# Altium PCB Punch Activated Solenoid Gun V2.PcbDoc
Units mm, origin at the board's own origin, x right, y up, seen from the top; angles counter-clockwise.
Board outline 67.59 x 51.5 mm, 2 copper layers (Top Layer, Bottom Layer); 7 components, 9 nets, 55 pads, 0 vias.
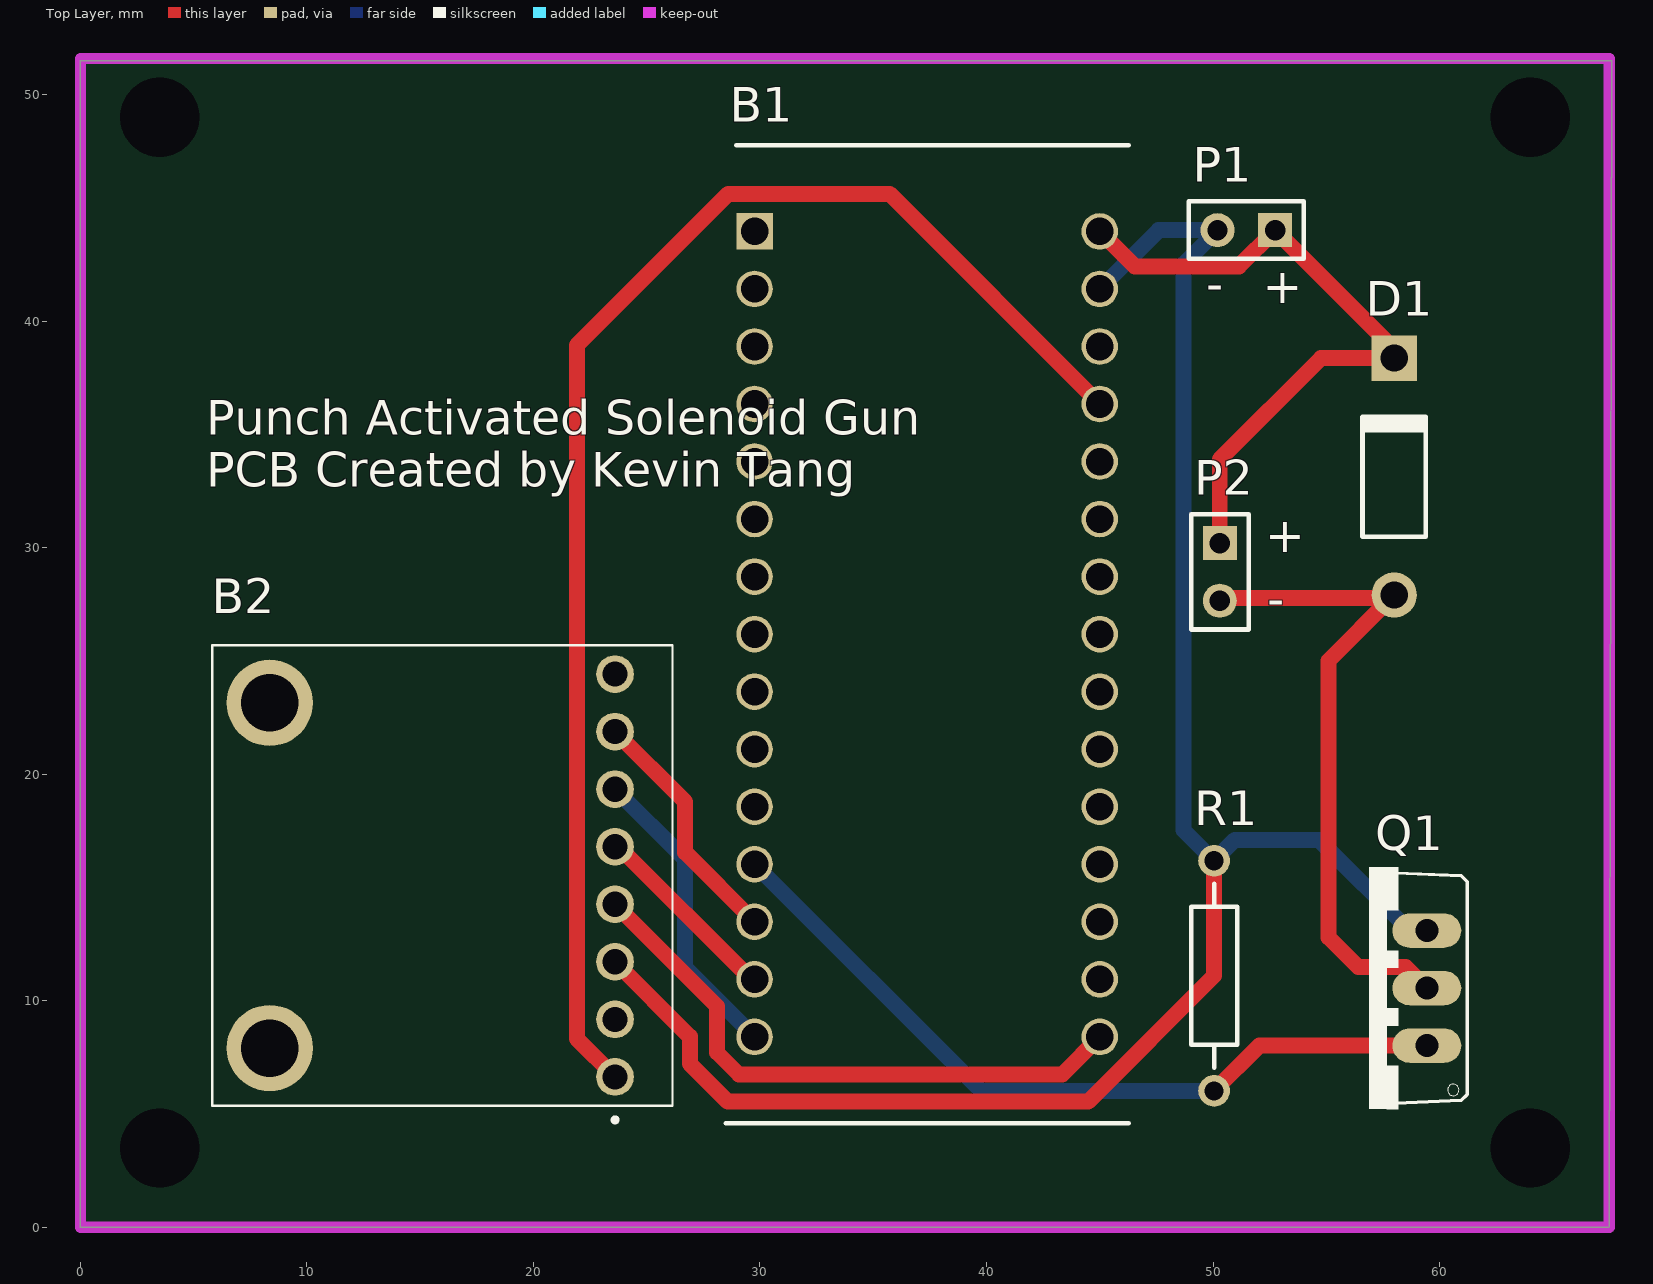
[diagram p0: Top Layer view]
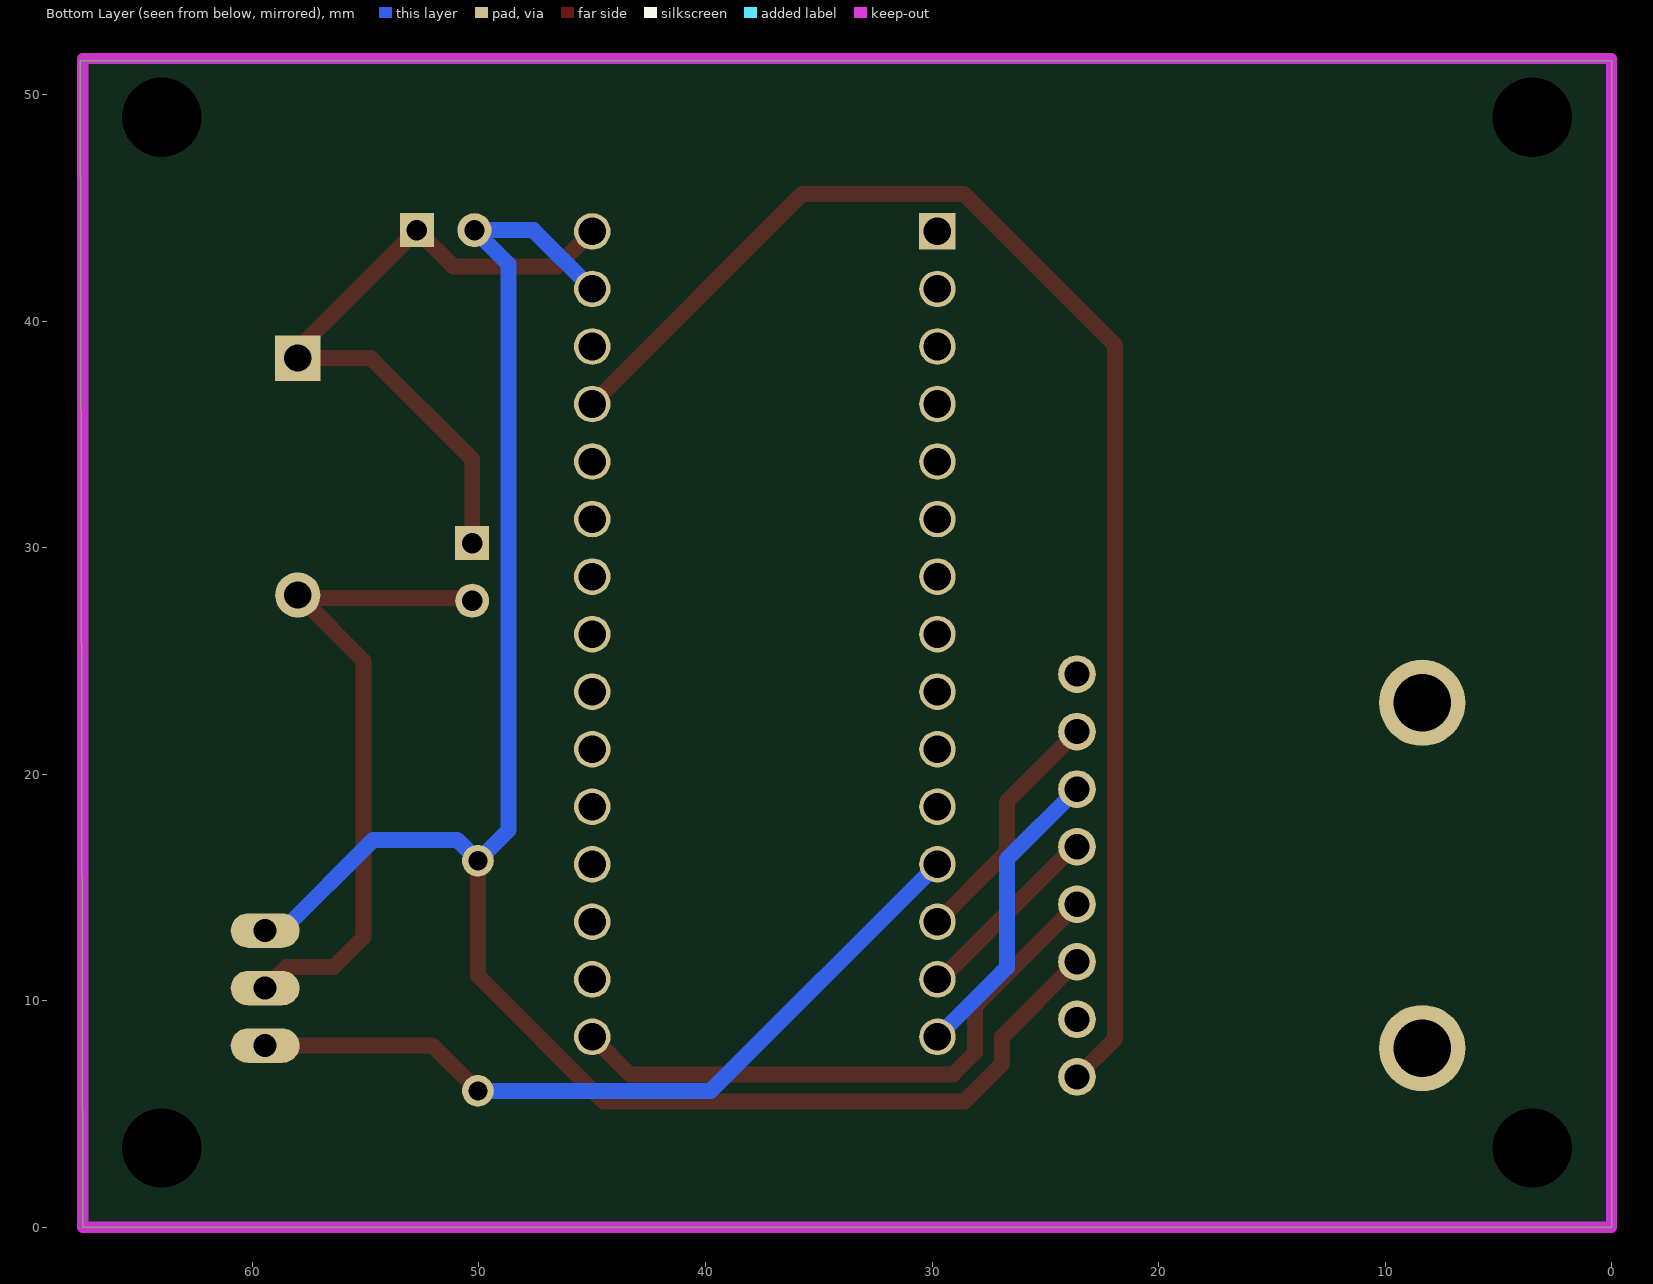
[diagram p1: Bottom Layer view, seen from below]

## Layer stack, top to bottom
Top Solder: solder mask 0.0102, Solder Resist, Dk 3.5
Top Layer: signal copper 0.0356
Dielectric 1: dielectric 0.32, FR-4, Dk 4.8
Bottom Layer: signal copper 0.0356
Bottom Solder: solder mask 0.0102, Solder Resist, Dk 3.5

## Board outline
0,0 67.5,0 67.594,51.5 0,51.5

## Design rules (kind name [scope] priority, off if disabled: settings)
Clearance [All] p1: gap=0.5 ignorepadtopadclearanceinfootprint=FALSE
HoleSize [All] p1: absolutevalues=TRUE maxlimit=10 minlimit=0.3 maxpercent=80.000 minpercent=20.000
PolygonConnect [All] p1: connectstyle=Relief reliefconductorwidth=0.5 reliefentries=4 polygonreliefangle="90 Angle" airgapwidth=0.5
RoutingVias [All] p1: holewidth=0.7 width=1.7 viastyle="Through Hole" minholewidth=0.6 minwidth=1.2 maxholewidth=1 maxwidth=2.2
SilkToSilkClearance [All] p1: silktosilkclearance=0.1
SilkToSolderMaskClearance [IsPad] p1: minsilkscreentomaskgap=0.1 clearancetoexposedcopper=TRUE
SolderMaskExpansion [All] p1: expansion=0.102
Width [All] p1: maxlimit=10 minlimit=0.5 preferedwidth=0.7
27 further rules are at their usual default settings.

## Components (designator, comment, footprint, x,y, rotation, side; value= is the part's Value field where it differs from the comment)
B1 "Nano" DIP1524W102P254L4318H762Q30N 37.38,26.185 r0 top
B2 "2809" 2809 23.6,6.64 r90 top
D1 "Diode 1N4007" DO-41 58,33.14 r90 top
P1 "LiPo Input" HDR1X2 52.74,44.023 r180 top
P2 "Solenoid Valve" HDR1X2 50.3,30.2 r270 top
Q1 "IRF520" TO220BV_IRF520(Primary) 56.898,10.559 r90 top
R1 "Res2" AXIAL-0.4 50.046,11.1 r270 top value=10K

## Footprints (in the part's own frame and the unit in brackets; to place one, negate y for a bottom-side part, rotate by r counter-clockwise, add the part's x,y. Pads: shape width x height; smd on the part's side, far side on the other; paste and mask are expansions set on the pad)
2809 [mm]
  round 1.665 hole 1.11: 1(0,0) 2(2.54,0) 3(5.08,0) 4(7.62,0) 5(10.16,0) 6(12.7,0) 7(15.24,0) 8(17.78,0)
  round 3.81 hole 2.54: MH1(1.27,15.24) MH2(16.51,15.24)
  silkscreen extent -2,-2.54 19.05,17.78, body extent -1.27,-2.54 19.05,17.78, height 5
AXIAL-0.4 [mm] "Axial Device, Thru-Hole; 2 Leads; 0.4 in Pin Spacing"
  round 1.4 hole 0.85: 1(-5.08,0) 2(5.08,0)
  silkscreen extent -4.06,-1.02 4.06,1.02
DIP1524W102P254L4318H762Q30N [mm]
  rect 1.616x1.616 / inner round 1.616 / far side rect 1.616x1.616 hole 1.216: 1(-7.62,17.78)
  round 1.616 hole 1.216: 2(-7.62,15.24) 3(-7.62,12.7) 4(-7.62,10.16) 5(-7.62,7.62) 6(-7.62,5.08) 7(-7.62,2.54) 8(-7.62,0) 9(-7.62,-2.54) 10(-7.62,-5.08) 11(-7.62,-7.62) 12(-7.62,-10.16) 13(-7.62,-12.7) 14(-7.62,-15.24) 15(-7.62,-17.78) 16(7.62,-17.78) 17(7.62,-15.24) 18(7.62,-12.7) 19(7.62,-10.16) 20(7.62,-7.62) 21(7.62,-5.08) 22(7.62,-2.54) 23(7.62,0) 24(7.62,2.54) 25(7.62,5.08) 26(7.62,7.62) 27(7.62,10.16) 28(7.62,12.7) 29(7.62,15.24) 30(7.62,17.78)
  silkscreen extent -8.89,-21.59 8.89,21.59, body extent -8.89,-21.46 8.89,21.72, height 7.62
DO-41 [mm] "Diode, Axial; Body 5.2 x 2.7 mm (LxDia. max), Lead Dia. 0.86 mm (max)"
  round 2 hole 1.2: 1(-5.23,0)
  rect 2x2 hole 1.2: 2(5.23,0)
  silkscreen extent -2.65,-1.4 2.75,1.4
HDR1X2 [mm] "Connector; Header; 2 Position"
  rect 1.5x1.5 hole 0.9: 1(0,0)
  round 1.5 hole 0.9: 2(2.54,0)
  silkscreen extent -1.27,-1.27 3.81,1.27
TO220BV_IRF520(Primary) [mil]
  oval 60x120 hole 40: D(0,-100) G(-100,-100) S(100,-100)
  silkscreen extent -210,-170 210,0

## Part data
B1: "Development Boards & Kits - AVR ARDUINO NANO V3 A000005", Manufacturer_Name=Arduino, Mouser Part Number=992-ARD-NANO30, RS Part Number=6961667, Allied_Number=70518857, Allied Price/Stock=http://www.alliedelec.com/arduino-a000005/70518857/, Datasheet Link=http://docs-emea.rs-online.com/webdocs/0db9/0900766b80db99cb.pdf, Geometry.Height=7.62mm, Manufacturer_Part_Number=Nano, Mouser Price/Stock=http://www.mouser.com/Search/ProductDetail.aspx?qs=Vxac6xGyzPmCaTfvE003gg%3d%3d, RS Price/Stock=http://uk.rs-online.com/web/p/products/6961667
B2: "Acceleration Sensor Development Tools Adafruit LIS3DH Triple-Axis Accelerometer (+-2g/4g/8g/16g)", Manufacturer_Name=Adafruit, Mouser Part Number=485-2809, Datasheet Link=http://www.mouser.com/datasheet/2/737/adafruit-lis3dh-triple-axis-accelerometer-breakout-780345.pdf, Geometry.Height=5mm, Manufacturer_Part_Number=2809, Mouser Price/Stock=https://www.mouser.com/Search/Refine.aspx?Keyword=485-2809
D1: "1 Amp General Purpose Rectifier", Code_JEDEC=DO-204-AL, ComponentLink1Description="Manufacturer Link", ComponentLink1URL=http://www.fairchildsemi.com/, ComponentLink2Description=Datasheet, ComponentLink2URL=http://www.fairchildsemi.com/ds/1N%2F1N4001.pdf, DatasheetVersion=1998, LatestRevisionDate=17-Jul-2002, LatestRevisionNote="Re-released for DXP Platform.", PackageDescription="Diode, Axial; Body 5.2 x 2.7 mm (LxDia. max), Lead Dia. 0.86 mm (max)", PackageReference=DO-41, PackageVersion=Aug-1999, Published=8-Jun-2000, Publisher="Altium Limited"
P1 P2: library part "Header 2", "Header, 2-Pin", LatestRevisionDate=17-Jul-2002, LatestRevisionNote="Re-released for DXP Platform.", Publisher="Altium Limited"
R1: "Resistor", LatestRevisionDate=17-Jul-2002, LatestRevisionNote="Re-released for DXP Platform.", PackageDescription="Axial Device, Thru-Hole; 2 Leads; 0.4 in Pin Spacing", PackageReference=AXIAL-0.4, Published=8-Jun-2000, Publisher="Altium Limited"

## Free pads (board coordinates)
  round 1.524 hole 3.5: 2(3.5,3.5) 3(3.5,49) 4(64,3.5) 5(64,49)

## Nets (pads, with @x,y where several pads share a name; then routed paths per layer and width w, separated by ;. In a path a pad name is that pad's centre, name@x,y a point inside that pad or via, vN(x,y) a via of type N, cw(c..) or ccw(c..) an arc to the next point about the centre after c; other vN are vias at no path point)
GND: B1.29 B2.3 P1.2 Q1.S R1.1 | length 83.8
  Top Layer w0.7: B2.3 26.902,8.418 26.902,7.221 28.576,5.547 44.487,5.547 50.046,11.106 R1.1
  Bottom Layer w0.7: B1.29 47.598,44.023 P1.2 48.7,42.523 48.7,17.526 R1.1 50.966,17.1 54.675,17.1 58.676,13.099 Q1.S
NetB1_12: B1.12 Q1.G R1.2 | length 34.7
  Top Layer w0.7: R1.2 52.045,8.019 Q1.G
  Bottom Layer w0.7: B1.12 39.765,6.02 R1.2
NetB1_13: B1.13 B2.7 | length 10.9
  Top Layer w0.7: B2.7 26.697,18.783 26.697,16.548 B1.13
NetB1_14: B1.14 B2.5 | length 8.6
  Top Layer w0.7: B2.5 23.753,16.8 29.608,10.945 B1.14
NetB1_15: B1.15 B2.6 | length 13.5
  Bottom Layer w0.7: B2.6 26.697,16.243 26.697,11.468 B1.15
NetB1_16: B1.16 B2.4 | length 26.4
  Top Layer w0.7: B2.4 28.102,9.758 28.102,7.718 29.073,6.747 43.342,6.747 B1.16
NetB1_27: B1.27 B2.1 | length 62.7
  Top Layer w0.7: B2.1 21.917,8.323 21.917,38.941 28.6,45.623 35.722,45.623 B1.27
NetB1_30: B1.30 D1.2 P1.1 P2.1 | length 30.1
  Top Layer w0.7: B1.30 46.542,42.423 51.14,42.423 P1.1 58,38.763 D1.2 54.77,38.37 50.3,33.9 P2.1
NetD1_1: D1.1 P2.2 Q1.D | length 29.2
  Top Layer w0.7: P2.2 50.425,27.785 D1.1@57.875,27.785 ; D1.1 D1.1@57.875,27.785 ; Q1.D 58.51,11.487 56.413,11.487 55.1,12.8 55.1,25.01 D1.1@57.875,27.785
pads on no net: B1.1 B1.2 B1.3 B1.4 B1.5 B1.6 B1.7 B1.8 B1.9 B1.10 B1.11 B1.17 B1.18 B1.19 B1.20 B1.21 B1.22 B1.23 B1.24 B1.25 B1.26 B1.28 B2.2 B2.8 B2.MH1 B2.MH2

## Keep-outs
Keep-Out Layer:
  lines w0.5: 0,0 67.5,0 67.5,51.6 0,51.6 0,0

## Silkscreen, mask and mechanical layers (free items; w line width, h text height)
Top Overlay:
  text "-" at 49.7,40.9 h1.52
  text "+" at 52.2,40.8 h1.52
  text "Punch Activated Solenoid Gun / PCB Created by Kevin Tang" at 5.546,32.7 h1.52
  text "+" at 52.3,29.8 h1.52
  text "-" at 52.4,27 h1.52